# Altium PCB MecaVac.PcbDoc (part 2 of 2)
Units mm, origin at the board's own origin, x right, y up, seen from the top; angles counter-clockwise.
Board outline 120 x 80 mm, 2 copper layers (Top Layer, Bottom Layer), stack 1.56 mm thick; 93 components, 53 nets, 292 pads, 63 vias.
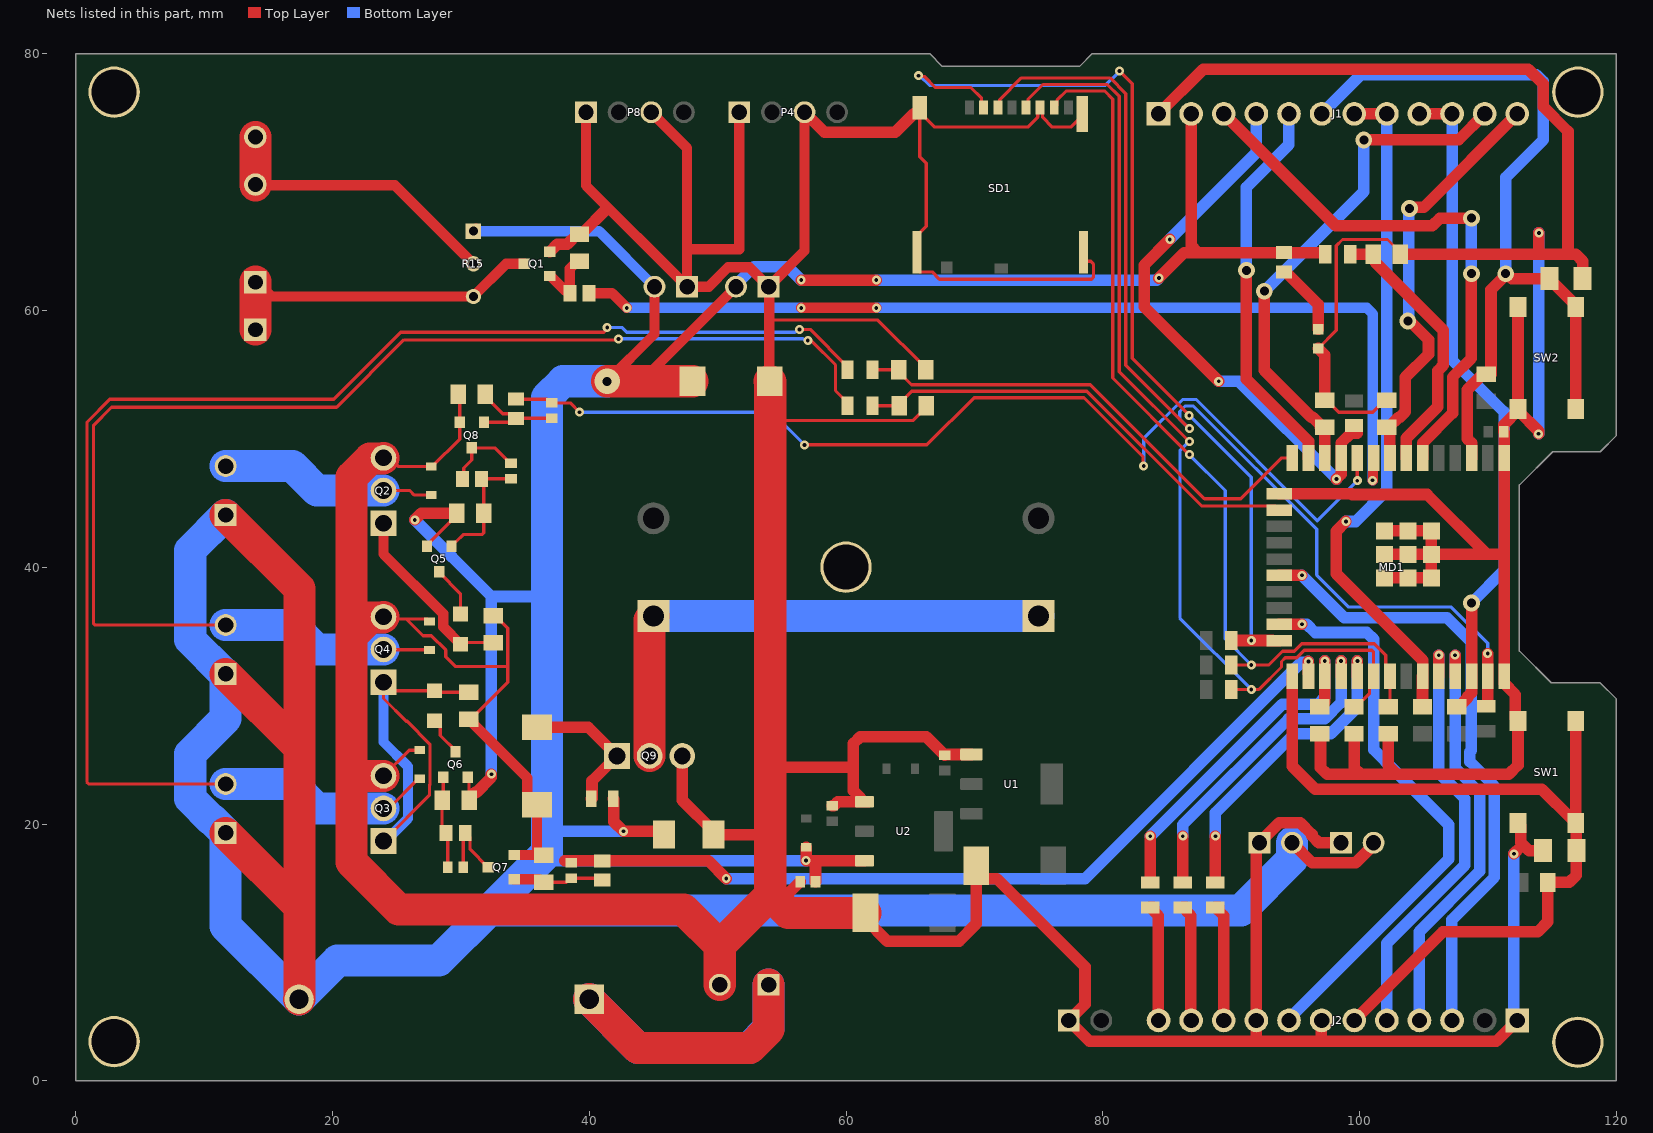
[diagram p2: the nets of this part, all layers, seen from the top]

## Via types
v1: diameter 0.7, hole 0.3, Top Layer to Bottom Layer, 50 vias
v2: diameter 1.3, hole 0.7, Top Layer to Bottom Layer, 11 vias
v3: diameter 2, hole 0.7, Top Layer to Bottom Layer, 2 vias

## Nets (pads, with @x,y where several pads share a name; then routed paths per layer and width w, separated by ;. In a path a pad name is that pad's centre, name@x,y a point inside that pad or via, vN(x,y) a via of type N, cw(c..) or ccw(c..) an arc to the next point about the centre after c; other vN are vias at no path point) (continued)
+12V: C2.2 C3.1 D2.1 D3.1 F1.2 J1.2 P1.1 P2.1 P3.1 P6.2 P7.2 P9.2 P10.2 Q5.2 Q6.2 R2.1 R15.1 R23.1 R24.1 R39.2 R40.1 U2.3 | length 427.2
  Top Layer w0.254: Q5.2@27.371,41.69 Q5.2@27.371,41.64 27.644,41.913 27.644,42.006 29.683,44.045 R23.1@29.683,44.196 ; Q6.2@30.541,23.638 30.642,23.537 R24.1@30.642,21.995
  Top Layer w0.8: R15.1@30.983,66.167 R15.1@31.183,66.367 ; v3(41.402,54.483) 45.085,58.166 P10.2@45.085,61.849 P10.2@44.943,61.991 ; 44.069,54.483 P9.2@51.435,61.849
  Top Layer w0.9: v1(26.416,43.688) 26.924,44.196 R23.1@29.683,44.196 ; R24.1@30.642,21.844 30.642,21.995 31.131,22.484 31.233,22.484 32.385,23.636 v1(32.385,23.876) ; R39.2@41.872,21.971 41.919,21.924 41.919,20.184 v1(42.672,19.431) 45.561,19.431 D3.1@45.815,19.177 ; v1(56.515,62.357) v1(62.357,62.357) ; D2.1@56.896,18.189 v1(56.896,17.145) 56.91,17.131 57.658,17.131 ; C3.1@57.623,15.494 57.623,17.096 57.658,17.131 ; U2.3@61.441,17.131 57.658,17.131 ; v1(84.366,62.522) 86.349,64.505 87.421,64.505 ; J1.2@86.883,75.311 86.883,65.043 87.421,64.505 ; P7.2@94.742,18.542 94.745,18.542 96.299,16.988 99.694,16.988 101.092,18.386 P6.2@101.092,18.542 ; R2.1@97.323,64.389 97.323,64.48 97.298,64.505 R40.1@94.107,64.505 87.421,64.505
  Top Layer w2.5: P1.1@11.684,19.304 17.432,13.556 ; P2.1@11.684,31.686 17.432,25.939 ; P3.1@11.684,44.069 17.432,38.321 17.432,25.939 ; F1.2@17.402,6.35 17.432,6.38 17.432,13.556 ; v3(41.402,54.483) 44.069,54.483 C2.2@48.044,54.483 ; 17.432,13.556 17.432,25.939
  Bottom Layer w0.8: 9.78,41.315 9.78,33.591 10.586,32.785 ; R15.1@30.983,66.167 40.767,66.167 P10.2@45.085,61.849
  Bottom Layer w0.9: v1(26.416,43.688) 32.385,37.719 ; v1(32.385,23.876) 32.385,37.719 ; 36.703,17.78 37.338,17.145 v1(56.896,17.145) ; 36.703,19.431 v1(42.672,19.431) ; 36.703,37.719 32.385,37.719 ; P9.2@51.435,61.849 51.435,62.005 52.833,63.403 55.469,63.403 v1(56.515,62.357) ; v1(62.357,62.357) 84.201,62.357 v1(84.366,62.522)
  Bottom Layer w2.5: P3.1@11.684,44.069 8.93,41.315 8.93,34.356 11.599,31.686 P2.1@11.684,31.686 11.684,28.207 8.93,25.453 8.93,21.973 10.543,20.36 10.628,20.36 P1.1@11.684,19.304 11.684,12.068 F1.2@17.402,6.35 20.41,9.358 28.281,9.358 32.194,13.271 ; v3(41.402,54.483) 37.973,54.483 36.703,53.213 36.703,37.719 36.703,19.431 36.703,17.78 32.194,13.271 ; P7.2@94.742,18.542 94.742,17.255 90.758,13.271 32.194,13.271
GND: C1.2 C2.1 C3.2 C4.2 C5.1 C6.1 C7.2 C10.1 C11.1 C16.1 D3.2 D4.2 D5.2 D6.2 D7.1 J1.1 J2.1 J2.7 J2.9 MD1.1 MD1.15 MD1.38 MD1.39 P4.1 P4.3 P5.2 P6.1 P7.1 P8.1 P8.3 P9.1 P10.1 P11.1 pad.1 Q1.2 Q2.3 Q3.3 Q4.3 Q7.2 Q8.2 Q9.3 R1.2 R14.1 R17.1 R18.1 R19.1 R20.1 R22.2 R29.2 R31.1 R32.1 R34.2 R36.2 R38.2 SD1.6 SD1.11 SD1.12 SD1.13 SD1.14 SW1.3 SW1.4 SW2.3 SW2.4 U1.1 U2.1 | length 698.5
  Top Layer w0.254: Q3.3@23.978,23.749 25.982,25.753 D5.2@26.797,25.753 ; Q4.3@23.978,36.131 24.151,35.959 25.769,35.959 ; Q2.3@23.978,48.514 24.45,48.514 25.113,47.851 D4.2@27.686,47.851 27.786,47.851 29.911,49.976 Q8.2@29.911,51.292 29.911,53.366 R31.1@29.81,53.467 ; D6.2@27.559,35.786 27.386,35.959 25.769,35.959 ; R34.2@30.758,28.159 33.647,31.048 33.647,32.258 ; R29.2@32.512,36.23 32.663,36.23 33.647,35.246 33.647,32.258 ; 54.02,59.182 54.085,59.247 62.478,59.247 66.202,55.523 R36.2@66.202,55.372 ; 54.102,51.435 65.245,51.435 66.237,52.427 R38.2@66.237,52.578 ; SD1.14@65.62,75.32 SD1.14@65.74,75.32 ; SD1.14@65.74,75.785 SD1.14@65.74,75.32 ; SD1.6@75.12,75.8 SD1.6@75.12,75.6 ; SD1.11@78.4,75.3 78.4,75.172 77.509,74.281 76.062,74.281 75.311,75.032 75.311,75.409 SD1.6@75.12,75.6 ; SD1.12@78.48,64.52 78.703,64.297 78.703,63.83 79.062,63.83 79.273,63.619 79.273,62.582 79.125,62.433 67.278,62.433 66.714,62.997 65.743,62.997 65.52,63.22 SD1.13@65.52,64.52 65.52,65.82 66.251,66.551 66.251,71.458 65.74,71.969 SD1.14@65.74,75.32 ; D7.1@96.774,57.035 98.179,58.44 98.179,65.034 98.669,65.524 102.175,65.524 103.159,64.54 R1.2@103.159,64.389 ; R18.1@97.282,52.994 97.433,52.994 98.363,52.064 101.027,52.064 101.957,52.994 R17.1@102.108,52.994 ; 25.769,35.959 27.056,34.671 27.713,34.671 28.829,33.555 28.829,33.02 29.591,32.258 33.647,32.258 ; SD1.14@65.74,75.32 65.86,75.32 66.899,74.281 74.154,74.281 74.93,75.057 74.93,75.41 SD1.6@75.12,75.6
  Top Layer w0.8: R34.2@30.607,28.159 30.758,28.159 30.961,27.956 30.961,27.805 35.176,23.59 35.176,22.096 35.771,21.501 C16.1@35.941,21.501 35.941,17.918 R32.1@36.272,17.587 ; Q7.2@34.147,17.587 R32.1@36.272,17.587 ; R32.1@36.449,17.561 36.423,17.587 R32.1@36.272,17.587 ; P8.1@39.751,75.438 39.751,69.723 P10.1@47.625,61.849 ; P8.3@44.831,75.438 47.625,72.644 47.625,64.77 ; P4.1@51.689,75.438 51.689,64.77 47.625,64.77 ; C2.1@54.064,54.483 54.064,54.653 54.02,54.697 54.02,59.182 54.02,61.804 P9.1@53.975,61.849 ; P4.3@56.769,75.438 56.769,64.643 P9.1@53.975,61.849 ; P10.1@47.625,61.849 49.308,61.849 50.812,63.353 52.471,63.353 P9.1@53.975,61.849 ; P10.1@47.625,61.849 47.625,64.77
  Top Layer w0.9: Q1.2@36.941,64.577 37.517,65.153 38.298,65.153 39.092,65.948 R22.2@39.243,65.948 39.394,65.948 41.402,67.956 ; Q9.3@47.244,25.298 47.244,21.857 49.689,19.412 D3.2@49.689,19.177 53.975,19.177 54.102,19.304 ; 54.102,14.478 55.407,14.478 C3.2@56.423,15.494 ; 54.102,24.511 54.182,24.431 60.579,24.431 ; P4.3@56.769,75.438 56.772,75.438 58.326,73.884 63.839,73.884 65.275,75.32 SD1.14@65.62,75.32 ; C4.2@58.928,21.428 59.063,21.428 59.366,21.731 U2.1@61.716,21.731 ; U2.1@61.166,21.731 61.166,22.006 60.579,22.593 60.579,24.431 ; C5.1@61.516,13.081 61.516,12.581 63.22,10.877 68.808,10.877 70.152,12.221 C6.1@70.152,16.303 ; U1.1@69.773,25.414 67.74,25.414 C7.2@67.691,25.365 66.259,26.797 61.106,26.797 60.579,26.27 60.579,24.431 ; C6.1@70.152,16.764 C6.1@70.152,16.303 ; J1.1@84.343,75.311 87.828,78.796 113.138,78.796 114.296,77.638 114.296,75.88 116.235,73.941 116.235,64.389 ; MD1.15@93.75,45.715 99.382,45.715 99.432,45.665 105.255,45.665 109.92,41 ; D7.1@96.774,57.035 97.282,56.527 R18.1@97.282,52.994 ; R14.1@96.901,27.016 96.955,26.962 96.955,24.392 97.482,23.865 100.095,23.865 ; J2.7@97.043,4.699 97.028,4.684 97.028,3.075 ; P6.1@98.552,18.542 96.823,18.542 96.296,19.069 96.296,19.186 95.386,20.096 93.756,20.096 91.963,18.303 J2.9@91.963,4.699 91.948,4.684 91.948,3.075 ; R19.1@99.568,27.016 99.568,24.392 100.095,23.865 ; MD1.39@101.925,39.165 MD1.39@103.76,39.165 MD1.39@105.595,39.165 MD1.39@105.595,41 ; MD1.39@101.925,41 MD1.39@103.76,41 MD1.39@105.595,41 ; MD1.39@101.925,42.835 MD1.39@103.76,42.835 MD1.39@105.595,42.835 MD1.39@105.595,41 ; R20.1@102.235,27.016 102.235,25.508 102.224,25.497 102.224,24.541 102.9,23.865 ; R1.2@103.159,64.389 113.97,64.389 ; v1(112.014,17.678) 112.577,18.241 112.874,18.241 ; J2.1@112.283,4.699 110.659,3.075 97.028,3.075 ; SW1.4@112.34,20.071 112.54,19.871 112.54,18.575 112.874,18.241 ; SW2.3@112.34,60.274 SW2.4@112.34,52.324 SW2.4@112.34,52.199 ; v1(113.944,50.394) 113.944,50.595 SW2.4@112.34,52.199 ; v1(113.97,66.04) 113.97,64.389 ; C10.1@114.295,17.932 114.27,17.907 113.208,17.907 112.874,18.241 ; C11.1@117.378,62.484 117.378,63.836 116.851,64.364 116.26,64.364 116.235,64.389 ; C6.1@70.152,16.303 70.702,15.753 71.75,15.753 78.613,8.89 78.613,5.969 P11.1@77.343,4.699 78.967,3.075 91.948,3.075 ; 91.948,3.075 97.028,3.075 ; 100.095,23.865 102.9,23.865 ; 102.9,23.865 111.614,23.865 112.34,24.591 SW1.3@112.34,28.021 112.14,28.221 112.14,30.07 111.26,30.95 MD1.38@111.26,31.5 111.26,41.021 ; MD1.39@105.595,41 109.92,41 ; 109.92,41 111.239,41 111.26,41.021 ; 111.26,41.021 MD1.1@111.26,48.5 111.26,50.503 C1.2@111.217,50.546 111.217,51.076 SW2.4@112.34,52.199 ; 113.97,64.389 116.235,64.389
  Top Layer w2.5: Q3.3@23.978,23.749 21.855,23.749 21.474,23.368 ; Q4.3@23.978,36.131 23.942,36.096 22.941,36.096 21.474,34.629 ; Q2.3@23.978,48.514 23.942,48.478 22.941,48.478 21.474,47.011 21.474,34.629 ; P5.2@50.165,7.483 50.165,10.541 ; C2.1@54.064,54.483 54.102,54.445 54.102,51.435 54.102,49.911 54.102,24.511 54.102,19.304 54.102,14.478 ; C5.1@61.516,13.081 55.499,13.081 54.102,14.478 ; 21.474,23.368 21.474,34.629 ; 21.474,23.368 21.474,17.046 25.168,13.352 47.354,13.352 50.165,10.541 ; 50.165,10.541 54.102,14.478
  Bottom Layer w0.9: v1(112.014,17.678) 112.014,4.968 J2.1@112.283,4.699 ; v1(113.944,50.394) 113.944,66.015 v1(113.97,66.04)
NetC8_1: C8.1 C9.1 Q9.2 | length 41
  Top Layer w2.5: Q9.2@44.704,25.298 44.704,35.894 C8.1@45,36.19
  Bottom Layer w2.5: C8.1@45,36.19 C9.1@75,36.19
NetC10_2: C10.2 J2.6 MD1.25 R11.1 SW1.1 SW1.2 | length 66.7
  Top Layer w0.9: MD1.25@94.75,31.5 94.75,24.503 96.542,22.711 114.2,22.711 116.515,20.396 116.64,20.396 SW1.2@116.84,20.196 ; J2.6@99.583,4.699 106.492,11.608 113.894,11.608 114.665,12.379 R11.1@114.665,15.443 114.69,15.469 116.34,15.469 116.868,15.996 116.868,20.044 SW1.2@116.84,20.071 SW1.2@116.84,20.196 ; SW1.1@116.84,28.021 SW1.2@116.84,20.196
NetC11_2: C11.2 J1.6 MD1.3 R16.1 SW2.1 SW2.2 | length 65
  Top Layer w0.9: MD1.3@108.72,48.5 108.72,49.676 108.397,49.999 108.397,53.819 109.604,55.026 R16.1@109.855,55.026 110.236,55.026 110.236,61.614 111.379,62.757 v2(111.379,62.865) 111.487,62.865 111.868,62.484 C11.2@114.778,62.484 ; C11.2@115.205,62.034 116.84,60.399 SW2.1@116.84,60.274 SW2.2@116.84,52.324
  Bottom Layer w0.9: J1.6@97.043,75.311 100.091,78.359 113.769,78.359 114.296,77.832 114.296,75.819 114.3,75.815 114.3,73.279 111.379,70.358 v2(111.379,62.865)
NetC12_1: C12.1 MD1.10 R27.1 | length 81.5
  Top Layer w0.254: R27.1@34.29,53.086 36.72,53.086 37.009,52.797 C12.1@37.084,52.797 38.516,52.797 v1(39.243,52.07) ; v1(56.769,49.53) 66.302,49.53 69.977,53.205 78.537,53.205 83.133,48.61 83.133,47.931 v1(83.185,47.879) ; v1(99.822,46.736) 99.822,48.492 MD1.10@99.83,48.5
  Bottom Layer w0.254: v1(39.243,52.07) 54.229,52.07 v1(56.769,49.53) ; v1(83.185,47.879) 83.185,50.03 86.219,53.064 87.271,53.064 96.71,43.624 v1(99.822,46.736)
NetC12_2: C12.2 Q8.1 R27.2 R31.2 | length 8.6
  Top Layer w0.254: Q8.1@31.811,51.292 33.998,51.292 R27.2@34.29,51.584 ; R31.2@31.912,53.467 31.912,53.316 33.268,51.96 33.915,51.96 R27.2@34.29,51.584 ; C12.2@37.084,51.597 34.303,51.597 R27.2@34.29,51.584
NetC13_1: C13.1 Q5.1 R23.2 R25.1 | length 9.5
  Top Layer w0.254: Q5.1@29.271,41.64 29.271,41.69 29.544,41.963 29.594,41.963 30.176,42.545 31.636,42.545 31.785,42.694 31.785,46.701 R25.1@31.623,46.863 31.658,46.898 C13.1@33.909,46.898
NetC13_2: C13.2 Q8.3 R25.2 | length 6.3
  Top Layer w0.254: R25.2@30.121,46.863 30.237,46.979 30.237,47.726 30.861,48.35 Q8.3@30.861,49.292 32.64,49.292 33.834,48.098 C13.2@33.909,48.098
NetC14_1: C14.1 MD1.26 R28.1 | length 66.7
  Top Layer w0.254: MD1.26@96.012,31.75 96.012,31.508 MD1.26@96.02,31.5
  Top Layer w0.9: 38.1,17.145 38.111,17.134 R28.1@41.021,17.134 49.287,17.134 v1(50.673,15.748) ; MD1.26@96.012,31.75 v1(96.012,32.665)
  Bottom Layer w0.9: v1(50.673,15.748) 78.613,15.748 95.464,32.599 95.947,32.599 v1(96.012,32.665)
NetC14_2: C14.2 Q7.1 R28.2 R32.2 | length 7.2
  Top Layer w0.254: R32.2@36.449,15.459 38.209,15.459 38.533,15.783 C14.2@38.608,15.783 40.87,15.783 R28.2@41.021,15.632
  Top Layer w0.8: Q7.1@34.147,15.687 36.07,15.687 36.298,15.459 R32.2@36.449,15.459
NetC15_1: C15.1 Q6.1 R24.2 R26.1 | length 7.2
  Top Layer w0.254: Q6.1@28.641,23.638 28.641,21.945 R24.2@28.54,21.844 28.54,19.604 R26.1@28.84,19.304 28.991,19.153 C15.1@28.991,16.637
NetC15_2: C15.2 Q7.3 R26.2 | length 6.2
  Top Layer w0.254: C15.2@30.191,16.637 30.191,19.153 R26.2@30.342,19.304 30.717,18.929 30.717,18.017 32.097,16.637 Q7.3@32.147,16.637
NetC16_2: C16.2 Q9.1 R39.1 | length 11.3
  Top Layer w0.9: C16.2@35.941,27.521 39.941,27.521 Q9.1@42.164,25.298 40.217,23.351 40.217,22.018 R39.1@40.17,21.971
NetD4_1: D4.1 P3.2 Q2.2 | length 16.9
  Top Layer w0.254: Q2.2@23.978,45.974 26.035,45.974 26.391,45.618 26.393,45.621 D4.1@27.686,45.621
  Bottom Layer w2.5: P3.2@11.684,47.879 16.879,47.879 18.784,45.974 Q2.2@23.978,45.974
NetD5_1: D5.1 P1.2 Q3.2 R35.1 | length 119.8
  Top Layer w0.254: P1.2@11.684,23.114 1.03,23.114 0.881,23.263 0.881,46.993 0.889,47.001 0.889,51.308 2.667,53.086 20.108,53.086 25.315,58.293 41.148,58.293 41.148,58.299 41.402,58.553 v1(41.402,58.674) ; Q3.2@23.978,21.209 24.383,21.209 26.697,23.523 D5.1@26.797,23.523 ; v1(56.388,58.516) 57.218,58.516 60.112,55.622 R35.1@60.112,55.372
  Bottom Layer w0.254: v1(41.402,58.674) 42.545,58.674 42.926,58.293 56.016,58.293 56.058,58.335 56.086,58.335 56.267,58.516 v1(56.388,58.516)
  Bottom Layer w2.5: P1.2@11.684,23.114 16.879,23.114 18.784,21.209 Q3.2@23.978,21.209
NetD6_1: D6.1 P2.2 Q4.2 R37.1 | length 107.4
  Top Layer w0.254: P2.2@11.684,35.496 1.538,35.496 1.389,35.645 1.389,46.783 1.397,46.791 1.397,51.054 2.794,52.451 20.32,52.451 25.569,57.7 42.206,57.7 v1(42.291,57.785) ; Q4.2@23.978,33.591 23.996,33.574 27.541,33.574 D6.1@27.559,33.556 ; v1(57.023,57.658) 57.108,57.573 57.362,57.573 59.182,55.753 59.182,53.758 60.112,52.828 R37.1@60.112,52.578
  Bottom Layer w0.254: v1(42.291,57.785) 56.651,57.785 56.693,57.743 56.938,57.743 v1(57.023,57.658)
  Bottom Layer w2.5: P2.2@11.684,35.496 16.879,35.496 18.784,33.591 Q4.2@23.978,33.591
NetD7_2: D7.2 R40.2 | length 5.6
  Top Layer w0.9: R40.2@94.107,63.003 94.236,63.003 96.774,60.465 D7.2@96.774,58.535
NetF1_1: F1.1 P5.1 | length 39.2
  Top Layer w2.5: F1.1@40.002,6.35 43.812,2.54 52.511,2.54 53.975,4.004 P5.1@53.975,7.483
  Bottom Layer w2.5: F1.1@40.002,6.35 43.812,2.54 52.451,2.54 53.975,4.064 P5.1@53.975,7.483
NetJ1_3: J1.3 MD1.6 | length 43.4
  Top Layer w0.9: J1.3@89.423,75.311 98.143,66.591 105.668,66.591 106.26,67.183 v2(108.712,67.183) ; MD1.6@104.91,48.5 104.91,49.676 107.243,52.008 107.243,54.811 108.712,56.28 v2(108.712,62.865)
  Bottom Layer w0.9: v2(108.712,62.865) v2(108.712,67.183)
NetJ1_4: J1.4 MD1.11 R3.2 | length 43.7
  Top Layer w0.9: v1(85.217,65.532) 83.212,63.527 83.212,60.298 v1(89.027,54.483) ; v1(98.204,46.869) 98.56,47.225 MD1.11@98.56,48.5 98.56,49.676 99.303,50.419 99.822,50.419
  Bottom Layer w0.9: v1(85.217,65.532) 91.963,72.278 J1.4@91.963,75.311 ; v1(89.027,54.483) 90.59,54.483 v1(98.204,46.869)
NetJ1_5: J1.5 MD1.13 | length 30.2
  Top Layer w0.9: v2(91.186,63.119) 91.186,54.635 96.02,49.801 MD1.13@96.02,48.5
  Bottom Layer w0.9: v2(91.186,63.119) 91.186,69.596 94.488,72.898 94.488,75.296 J1.5@94.503,75.311
NetJ1_7: J1.7 J1.8 MD1.33 R4.2 | length 53.6
  Top Layer w0.9: v1(98.933,43.561) 98.171,42.799 98.171,39.497 104.91,32.758 MD1.33@104.91,31.5 ; J1.7@99.583,75.311 J1.8@102.123,75.311 ; R4.2@104.902,29.118 MD1.33@104.902,31.492
  Bottom Layer w0.9: v1(98.933,43.561) 99.695,43.561 102.123,45.989 J1.8@102.123,75.311
NetJ1_9: J1.9 J1.10 MD1.36 R5.2 | length 52
  Top Layer w0.9: J1.9@104.663,75.311 J1.10@107.203,75.311 ; R5.2@107.569,29.118 107.72,29.118 108.426,29.824 108.426,29.936 108.72,30.23 MD1.36@108.72,31.5 108.72,37.203 v2(108.712,37.211)
  Bottom Layer w0.9: J1.10@107.203,75.311 107.203,56.143 111.252,52.094 111.252,39.751 v2(108.712,37.211)
NetJ1_11: J1.11 MD1.12 R18.2 | length 40.5
  Top Layer w0.9: v2(92.583,61.502) 92.583,55.34 96.241,51.682 96.341,51.682 97.131,50.892 R18.2@97.282,50.892 ; R18.2@96.925,50.892 97.29,50.527 MD1.12@97.29,48.5 ; v2(100.33,73.279) 107.711,73.279 J1.11@109.743,75.311
  Bottom Layer w0.9: v2(92.583,61.502) 100.33,69.249 v2(100.33,73.279)
NetJ1_12: J1.12 MD1.8 R17.2 | length 33.2
  Top Layer w0.9: R17.2@102.108,50.892 102.259,50.892 103.049,51.682 103.149,51.682 103.566,52.099 103.566,54.788 105.367,56.589 105.367,57.711 103.972,59.105 103.836,59.105 v2(103.759,59.182) ; R17.2@102.362,50.892 102.362,49.058 102.37,49.05 MD1.8@102.37,48.5 ; v2(103.886,67.945) 103.963,68.022 104.994,68.022 J1.12@112.283,75.311
  Bottom Layer w0.9: v2(103.759,59.182) 103.822,59.245 103.822,67.882 v2(103.886,67.945)
NetJ2_3: J2.3 MD1.20 | length 48.7
  Top Layer w0.9: MD1.20@93.75,39.365 95.499,39.365 v1(95.504,39.37)
  Bottom Layer w0.9: v1(95.504,39.37) 98.806,36.068 106.807,36.068 108.712,34.163 108.712,25.724 108.596,25.608 108.596,24.862 110.501,22.957 110.501,15.84 107.188,12.527 J2.3@107.188,4.787
NetJ2_4: J2.4 MD1.35 | length 32.7
  Top Layer w0.9: v1(107.442,33.147) 107.45,33.139 MD1.35@107.45,31.5
  Bottom Layer w0.9: J2.4@104.648,4.882 104.648,11.619 109.347,16.318 109.347,22.46 107.56,24.248 107.56,24.266 107.442,24.384 v1(107.442,33.147)
NetJ2_5: J2.5 MD1.34 | length 33.5
  Top Layer w0.9: v1(106.172,33.147) 106.18,33.139 MD1.34@106.18,31.5
  Bottom Layer w0.9: J2.5@102.108,4.637 102.108,10.711 108.193,16.796 108.193,21.982 106.172,24.003 v1(106.172,33.147)
NetJ2_8: J2.8 MD1.23 | length 45.1
  Top Layer w0.9: MD1.23@93.75,35.555 95.499,35.555 v1(95.504,35.56)
  Bottom Layer w0.9: J2.8@94.503,4.699 94.503,4.841 106.934,17.272 106.934,19.947 102.816,24.065 102.816,24.076 101.092,25.8 101.092,34.387 100.565,34.914 96.531,34.914 95.885,35.56 v1(95.504,35.56)
NetJ2_10: J2.10 R10.2 | length 9.3
  Top Layer w0.9: R10.2@88.773,13.503 89.023,13.503 89.048,13.478 89.048,13.228 89.408,12.868 J2.10@89.408,4.644
NetJ2_11: J2.11 R12.2 | length 9.3
  Top Layer w0.9: R12.2@86.233,13.503 86.483,13.503 86.508,13.478 86.508,13.228 86.868,12.868 J2.11@86.868,4.623
NetJ2_12: J2.12 R13.2 | length 9.1
  Top Layer w0.9: R13.2@83.693,13.503 83.943,13.503 83.968,13.478 83.968,13.228 84.328,12.868 J2.12@84.328,4.793
NetLS1_1: LS1.1 pad.3 Q1.3 R15.3 | length 26.2
  Top Layer w0.8: pad.3@14,62.25 14.127,62.25 15.29,61.087 R15.3@30.983,61.087 33.523,63.627 Q1.3@34.941,63.627
  Top Layer w2.5: LS1.1@14,58.5 pad.3@14,62.25
NetLS1_2: LS1.2 pad.4 R15.2 | length 23.3
  Top Layer w0.8: pad.4@14,69.75 24.86,69.75 R15.2@30.983,63.627
  Top Layer w2.5: pad.4@14,69.75 LS1.2@14,73.5
NetMD1_7: MD1.7 R1.1 R2.2 | length 21.1
  Top Layer w0.9: R2.2@99.273,64.389 R1.1@101.057,64.389 101.21,64.236 101.21,63.763 106.521,58.452 106.521,55.721 106.089,55.289 106.089,52.486 103.64,50.038 MD1.7@103.64,48.5
NetMD1_9: MD1.9 R21.1 | length 76.4
  Top Layer w0.8: R21.1@39.994,61.341 41.783,61.341 v1(42.926,60.198) ; v1(56.515,60.198) v1(62.357,60.198) ; v1(101.019,46.769) 101.05,46.8 101.05,48.45 MD1.9@101.1,48.5
  Bottom Layer w0.8: v1(42.926,60.198) v1(56.515,60.198) ; v1(62.357,60.198) 100.55,60.198 101.019,59.729 v1(101.019,46.769)
NetMD1_14: MD1.14 R35.2 R36.1 | length 38.2
  Top Layer w0.254: R35.2@62.062,55.372 R36.1@64.1,55.372 64.1,55.221 65.1,54.221 79.033,54.221 87.915,45.339 90.742,45.339 93.903,48.5 MD1.14@94.75,48.5
NetMD1_16: MD1.16 R37.2 R38.1 | length 36.1
  Top Layer w0.254: R37.2@62.062,52.578 R38.1@64.135,52.578 64.135,52.729 65.119,53.713 78.748,53.713 87.693,44.768 93.427,44.768 MD1.16@93.75,44.445
NetMD1_24: MD1.24 R6.2 SD1.2 | length 75.3
  Top Layer w0.254: v1(65.634,78.283) 65.693,78.223 66.1,78.223 66.959,77.364 69.728,77.364 70.561,76.53 70.561,75.959 SD1.2@70.72,75.8 ; v1(81.305,78.638) 82.296,77.648 82.296,56.261 v1(86.732,51.825)
  Top Layer w0.9: R6.2@90.002,34.29 v1(91.567,34.29) 93.195,34.29 93.2,34.285 MD1.24@93.75,34.285
  Bottom Layer w0.254: v1(65.634,78.283) 65.754,78.283 66.516,77.521 80.188,77.521 v1(81.305,78.638) ; v1(86.732,51.825) 86.75,51.825 91.567,47.008 v1(91.567,34.29)
NetMD1_27: MD1.27 R13.1 R14.2 | length 28.3
  Top Layer w0.9: R13.1@83.693,15.453 v1(83.693,19.05) ; R14.2@96.901,29.118 97.052,29.118 97.205,29.271 97.205,29.422 97.29,29.507 MD1.27@97.29,31.5 v1(97.29,32.697)
  Bottom Layer w0.9: v1(83.693,19.05) 93.98,29.337 96.755,29.337 97.29,29.872 v1(97.29,32.697)
NetMD1_28: MD1.28 R12.1 | length 25.2
  Top Layer w0.9: R12.1@86.233,15.453 v1(86.233,19.05) ; MD1.28@98.56,31.5 v1(98.56,32.697)
  Bottom Layer w0.9: v1(86.233,19.05) 86.233,19.958 94.458,28.183 97.282,28.183 98.56,29.461 v1(98.56,32.697)
NetMD1_29: MD1.29 R10.1 | length 24.7
  Top Layer w0.9: R10.1@88.773,15.453 v1(88.773,19.05) ; MD1.29@99.83,31.5 v1(99.83,32.697)
  Bottom Layer w0.9: v1(88.773,19.05) 88.773,20.866 94.936,27.029 97.76,27.029 99.83,29.099 v1(99.83,32.697)
NetMD1_30: MD1.30 R8.2 R19.2 SD1.5 | length 77.4
  Top Layer w0.254: SD1.5@74.02,75.8 74.168,75.948 74.168,76.429 75.336,77.597 80.354,77.597 81.28,76.671 81.28,55.227 86.714,49.793 v1(86.75,49.793) ; R8.2@90.002,30.48 v1(91.567,30.48) 92.17,30.48 93.919,32.229 93.919,32.658 94.207,32.946 95.118,32.946 95.7,33.528 100.943,33.528 101.092,33.379 101.092,31.508 MD1.30@101.1,31.5 100.777,31.177 100.777,30.176 99.719,29.118 R19.2@99.568,29.118
  Bottom Layer w0.254: v1(86.75,49.793) 86.732,49.793 86.01,49.071 86.01,36.037 v1(91.567,30.48)
NetMD1_31: MD1.31 R9.2 R20.2 SD1.7 | length 71.4
  Top Layer w0.254: SD1.7@76.22,75.8 76.443,76.023 76.443,76.392 77.14,77.089 80.143,77.089 80.772,76.46 80.772,54.737 v1(86.741,48.768) ; R9.2@90.002,32.385 v1(91.567,32.385) 92.928,32.385 93.997,33.454 94.908,33.454 95.49,34.036 101.154,34.036 102.047,33.143 102.047,31.823 MD1.31@102.37,31.5 102.37,29.253 R20.2@102.235,29.118
  Bottom Layer w0.254: v1(86.741,48.768) 89.535,45.974 89.535,34.417 v1(91.567,32.385)
NetMD1_37: MD1.37 R7.2 SD1.3 | length 80.4
  Top Layer w0.254: SD1.3@71.82,75.8 71.958,75.938 71.958,76.403 73.66,78.105 80.564,78.105 81.788,76.881 81.788,55.735 86.723,50.8 v1(86.741,50.8)
  Top Layer w0.9: R7.2@109.855,29.169 109.957,29.169 109.982,29.194 v1(109.982,33.274)
  Bottom Layer w0.254: v1(86.741,50.8) 86.723,50.8 86.001,51.522 86.001,52.128 86.429,52.556 87.061,52.556 96.663,42.953 96.663,39.386 99.15,36.899 107.151,36.899 109.982,34.068 v1(109.982,33.274)
NetQ1_1: Q1.1 R21.2 R22.1 | length 4.5
  Top Layer w0.8: Q1.1@36.941,62.677 36.991,62.677 R21.2@38.096,61.572 ; R21.2@38.492,61.341 38.492,63.246 39.092,63.846 R22.1@39.243,63.846
NetQ2_1: Q2.1 R29.1 R30.2 | length 14.5
  Top Layer w0.254: R30.2@29.972,34.004 30.096,34.128 R29.1@32.512,34.128
  Top Layer w0.8: Q2.1@23.978,43.434 23.978,41.022 28.628,36.372 28.628,35.348 R30.2@29.972,34.004
NetQ3_1: Q3.1 Q4.1 R33.2 R34.1 | length 36.4
  Top Layer w0.254: Q3.1@23.978,18.669 27.556,22.247 27.556,23.013 27.593,23.05 27.593,26.226 25.818,28.001 25.753,28.001 23.978,29.776 Q4.1@23.978,31.051 24.645,30.385 R33.2@27.94,30.385 28.064,30.261 R34.1@30.607,30.261
  Bottom Layer w0.8: Q3.1@23.978,18.669 24.578,19.269 24.731,19.269 25.882,20.42 25.882,24.484 23.978,26.388 Q4.1@23.978,31.051
NetQ5_3: Q5.3 R30.1 | length 4
  Top Layer w0.254: Q5.3@28.321,39.64 28.321,39.59 29.972,37.939 R30.1@29.972,36.354
NetQ6_3: Q6.3 R33.1 | length 3.1
  Top Layer w0.254: R33.1@27.94,28.035 28.388,27.587 28.388,26.891 29.591,25.688 Q6.3@29.591,25.638
pads on no net: MD1.4 MD1.5 MD1.17 MD1.18 MD1.19 MD1.21 MD1.22 MD1.32 SD1.1 SD1.8 SD1.9 SD1.10

## Polygon pours and split planes (outlines as drawn)
GND on Top Layer "GND_L01_P000" (hatched Horizontal grid 0.508 track 0.203, remove dead copper, pour order 0): 112.45,33.473 114.923,31 118.733,31 120,29.733 120,0 0,0 0,80 66.523,80 67.494,79 78.194,79 79.172,80 120,80 120,50.25 118.75,49 115.04,49 112.45,46.41
GND on Bottom Layer "GND_L02_P001" (hatched Horizontal grid 0.508 track 0.203, remove dead copper, pour order 1): 112.45,33.473 114.923,31 118.733,31 120,29.733 120,0 0,0 0,80 66.523,80 67.494,79 78.194,79 79.172,80 120,80 120,50.25 118.75,49 115.04,49 112.45,46.41

## Keep-outs
Keep-Out Layer:
  lines w0.254: 120,29.718 120,29.733 ; 120,50.25 120,50.277
  lines w0.8: 118.723,49 115.04,49 112.45,46.41 112.45,33.473 114.923,31 118.733,31
  lines w1: 118.733,31 120,29.733 ; 118.75,49 120,50.25 ; 120,29.718 120,0 0,0 0,80 66.523,80 67.494,79 78.194,79 79.172,80 120,80 120,50.277

## Silkscreen, mask and mechanical layers (free items; w line width, h text height)
Top Overlay:
  text "B1" at 110.303,70.164 h1.52 r90
  text "B2" at 112.865,70.011 h1.52 r90
  text "GND" at 40.295,69.049 h1.52 r90
  text "GND" at 45.379,69.049 h1.52 r90
  text "GND" at 52.233,69.034 h1.52 r90
  text "GND" at 57.317,69.049 h1.52 r90
  text "RST" at 97.522,68.986 h1.52 r90
  text "SCL" at 105.209,68.946 h1.52 r90
  text "SCL" at 107.771,68.946 h1.52 r90
  text "VAC" at 89.872,68.777 h1.52 r90
  text "SDA" at 100.085,68.76 h1.52 r90
  text "SDA" at 102.647,68.76 h1.52 r90
  text "GND" at 84.78,68.688 h1.52 r90
  text "+12V" at 87.311,68.418 h1.52 r90
  text "+3.3V" at 42.83,68.399 h1.52 r90
  text "+3.3V" at 47.915,68.399 h1.52 r90
  text "+3.3V" at 54.768,68.399 h1.52 r90
  text "+3.3V" at 59.853,68.399 h1.52 r90
  text "MAG1" at 94.96,67.965 h1.52 r90
  text "TERM" at 92.398,67.852 h1.52 r90
  text "GND" at 46.301,65.369 h1.52
  text "GND" at 53.794,65.369 h1.52
  text "+12V" at 42.364,65.351 h1.52
  text "+12V" at 49.857,65.351 h1.52
  text "RESET" at 119.249,54.314 h1.52 r90
  text "GND" at 6.767,46.431 h1.52 r90
  text "+12V" at 6.785,42.466 h1.52 r90
  text "LAMPADA" at 16.338,42.234 h1.52 r90
  text "GND" at 6.767,34.049 h1.52 r90
  text "PELTIER" at 16.51,30.179 h1.52 r90
  text "+12V" at 6.785,30.103 h1.52 r90
  text "BOOT" at 119.249,22.347 h1.52 r90
  text "GND" at 89.608,22.062 h1.52
  text "GND" at 97.101,22.062 h1.52
  text "+12V" at 93.164,22.044 h1.52
  text "+12V" at 100.657,22.044 h1.52
  text "GND" at 6.767,21.666 h1.52 r90
  text "PELTIER" at 16.51,17.796 h1.52 r90
  text "+12V" at 6.785,17.721 h1.52 r90
  text "GND" at 77.76,8.328 h1.52 r90
  text "+5V" at 80.303,8.328 h1.52 r90
  text "LED R" at 84.788,8.328 h1.52 r90
  text "LED G" at 87.313,8.328 h1.52 r90
  text "LED B" at 89.875,8.328 h1.52 r90
  text "GND" at 92.4,8.328 h1.52 r90
  text "MAG2" at 94.943,8.328 h1.52 r90
  text "GND" at 97.486,8.328 h1.52 r90
  text "BOOT" at 100.029,8.328 h1.52 r90
  text "RX" at 102.568,8.328 h1.52 r90
  text "TX" at 105.171,8.328 h1.52 r90
  text "CLK" at 107.715,8.328 h1.52 r90
  text "+5V" at 110.276,8.328 h1.52 r90
  text "GND" at 112.837,8.328 h1.52 r90
  text "GND" at 52.527,1.615 h1.52
  text "+12V" at 48.582,1.597 h1.52
Bottom Overlay:
  drawing of 9 lines, arcs and shapes, not listed
  text "Refrigerador De Vacinas     Rev. V1.0       25/12/2022" at 7.95,70.79 h3 r90